# Altium PCB PCB-BOARD.PcbDoc
Units mil, origin at the board's own origin, x right, y up, seen from the top; angles counter-clockwise.
Board outline 1100 x 2700 mil, 4 copper layers (Top Layer 1, Top Layer, Bottom Layer, Bottom Layer 1), stack 22.334 mil thick; 47 components, 55 nets, 230 pads, 90 vias.
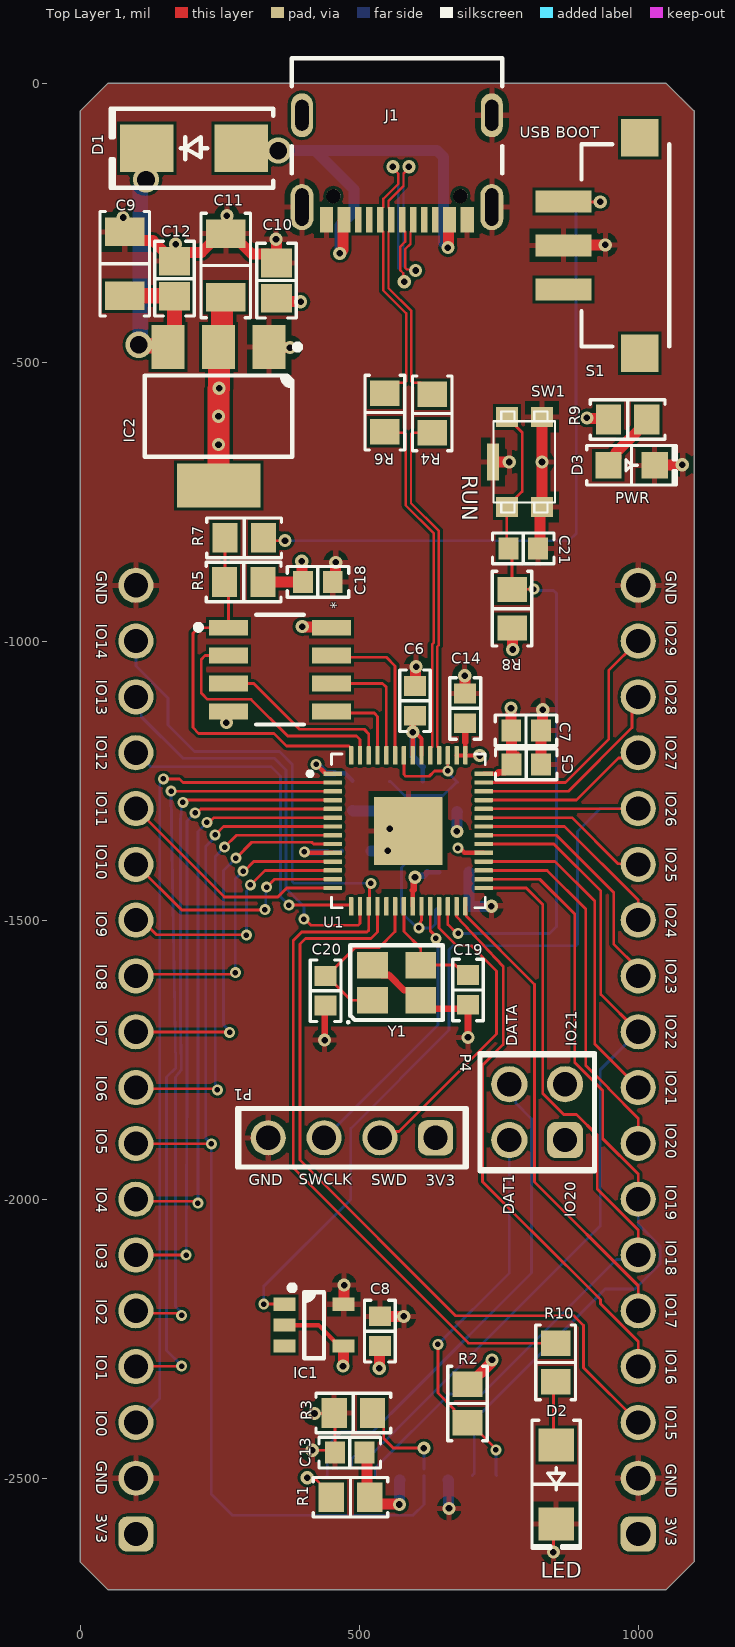
[diagram p0: Top Layer 1 view]
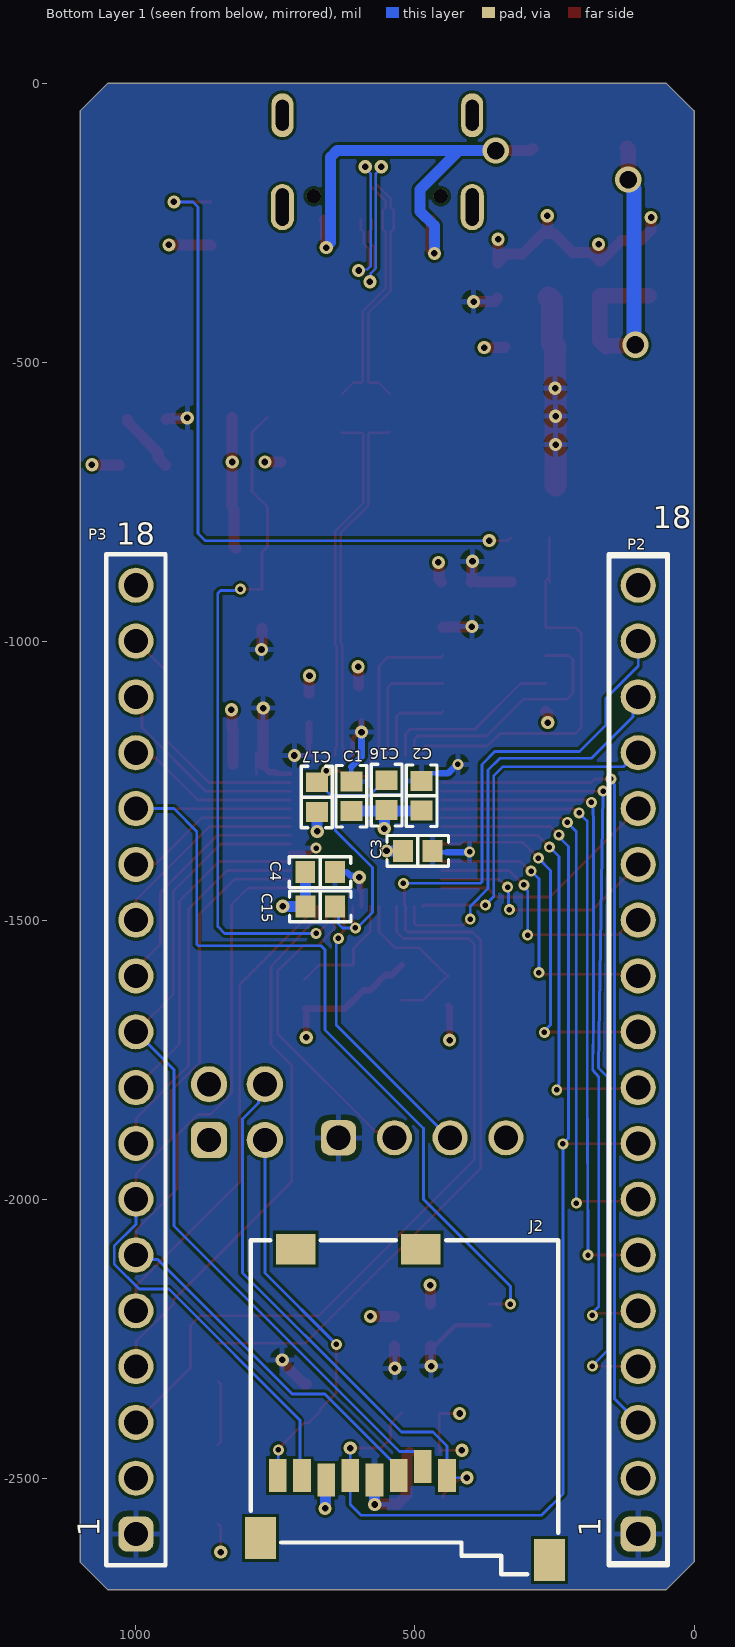
[diagram p1: Bottom Layer 1 view, seen from below]
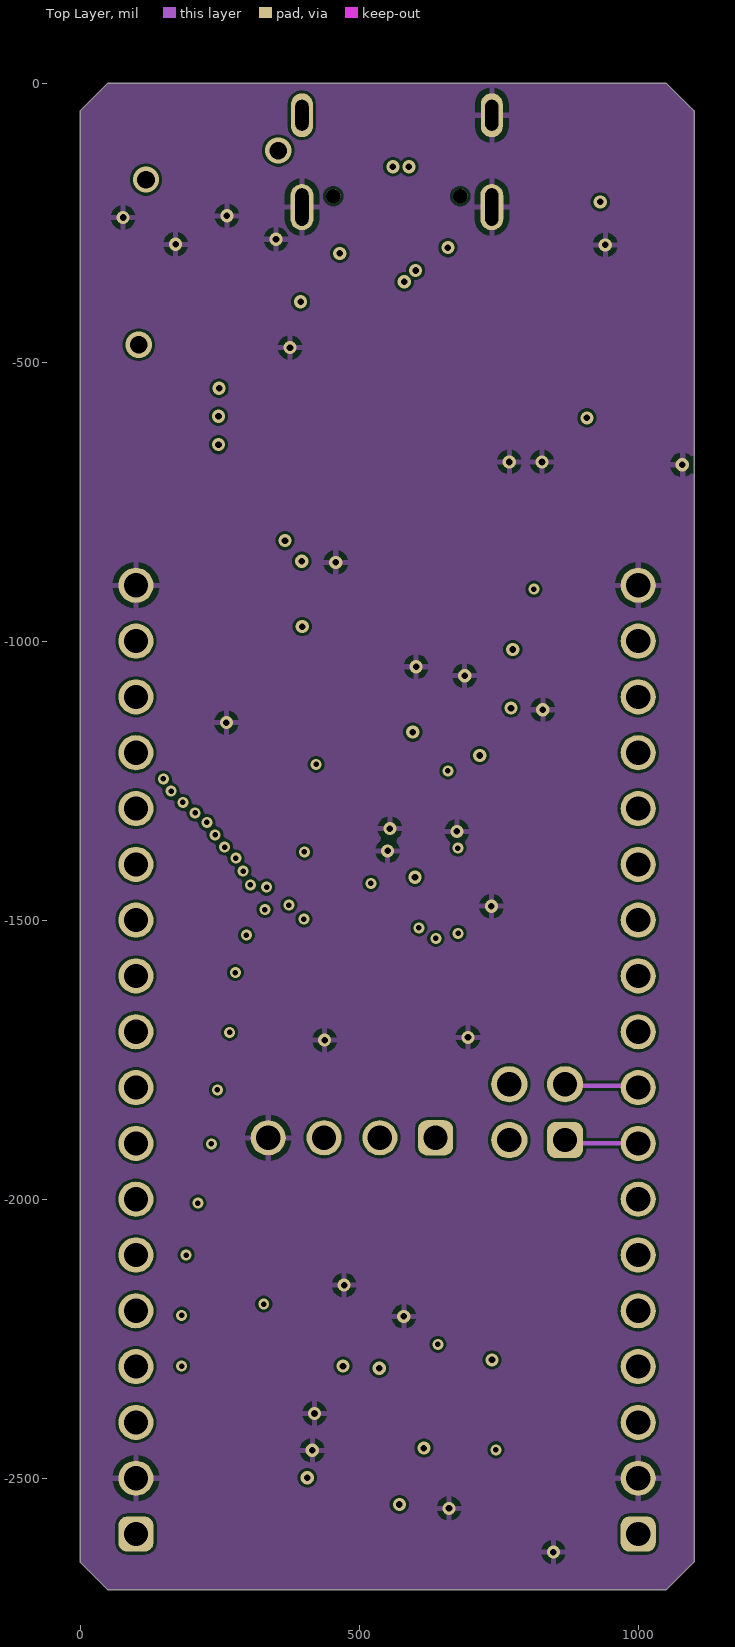
[diagram p2: Top Layer]
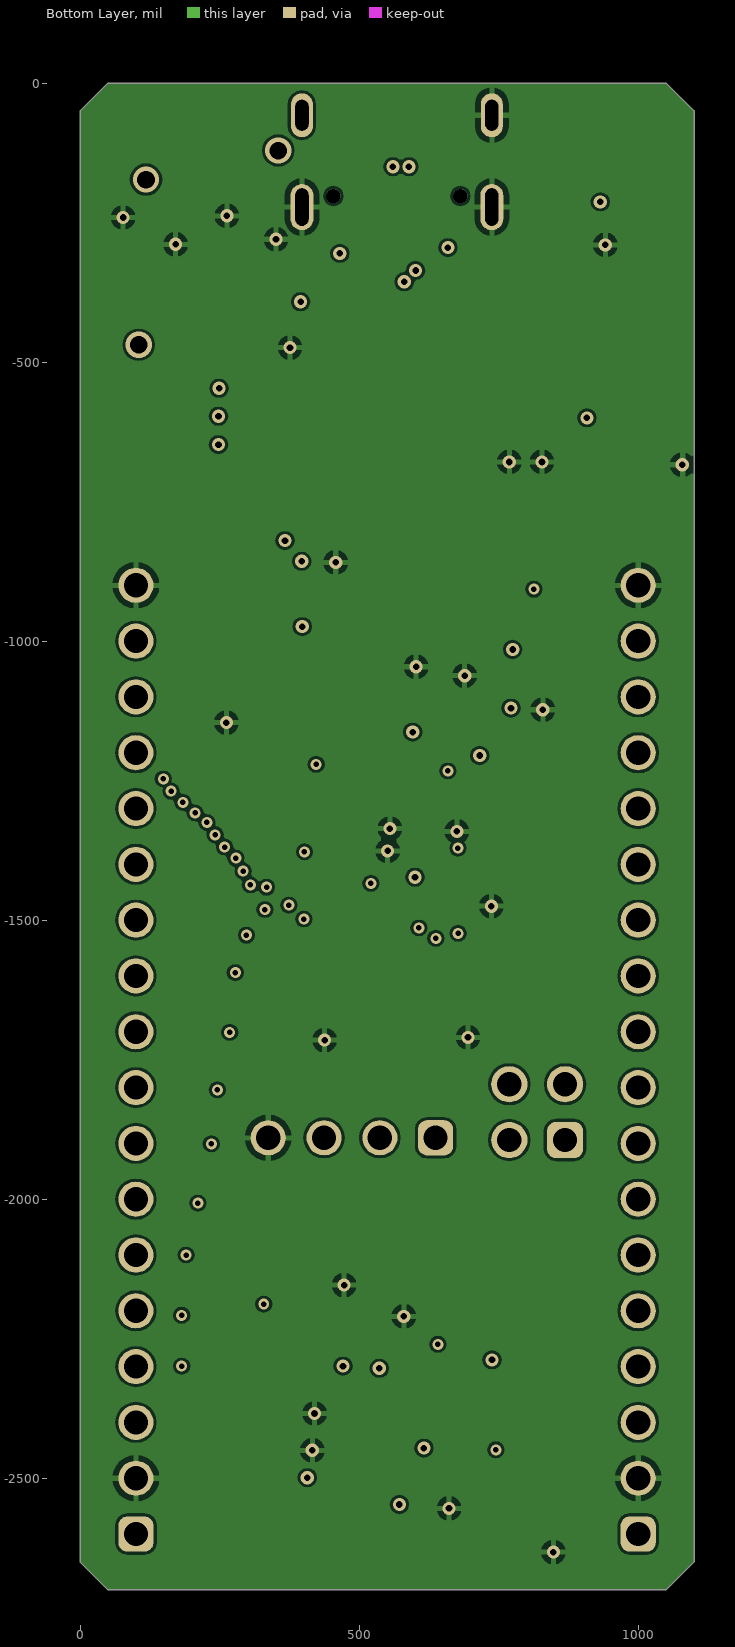
[diagram p3: Bottom Layer]
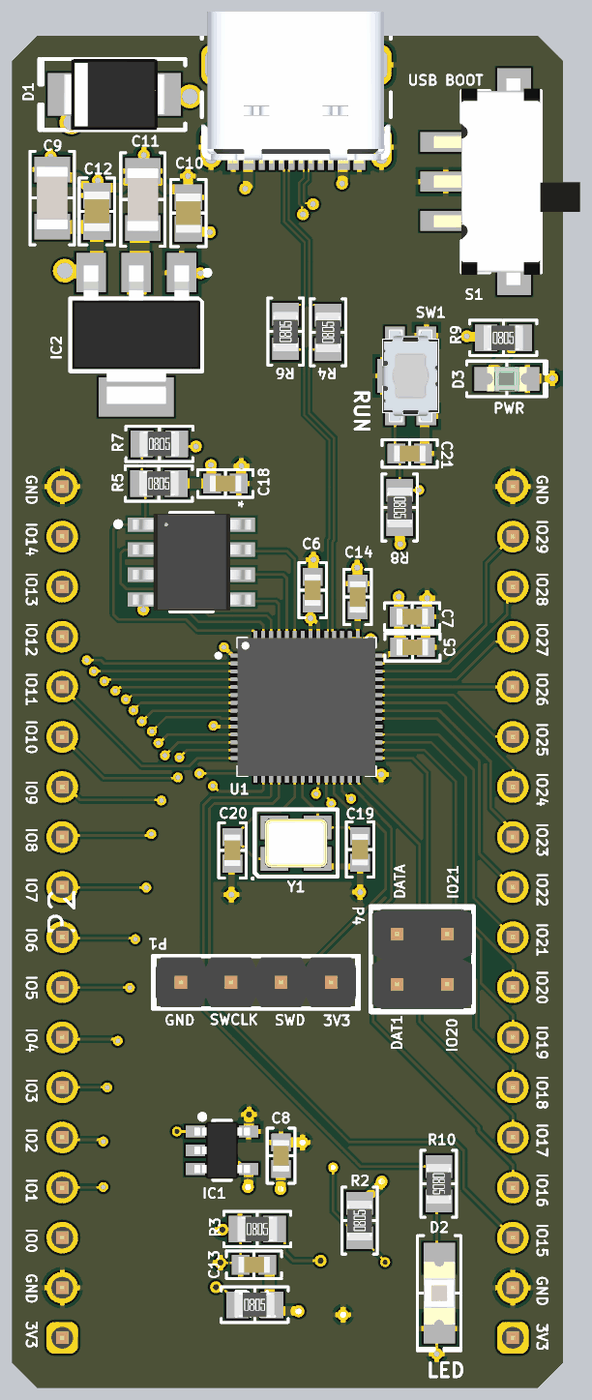
[diagram p4: 3D render of the assembled board from above, using the file's embedded part models]
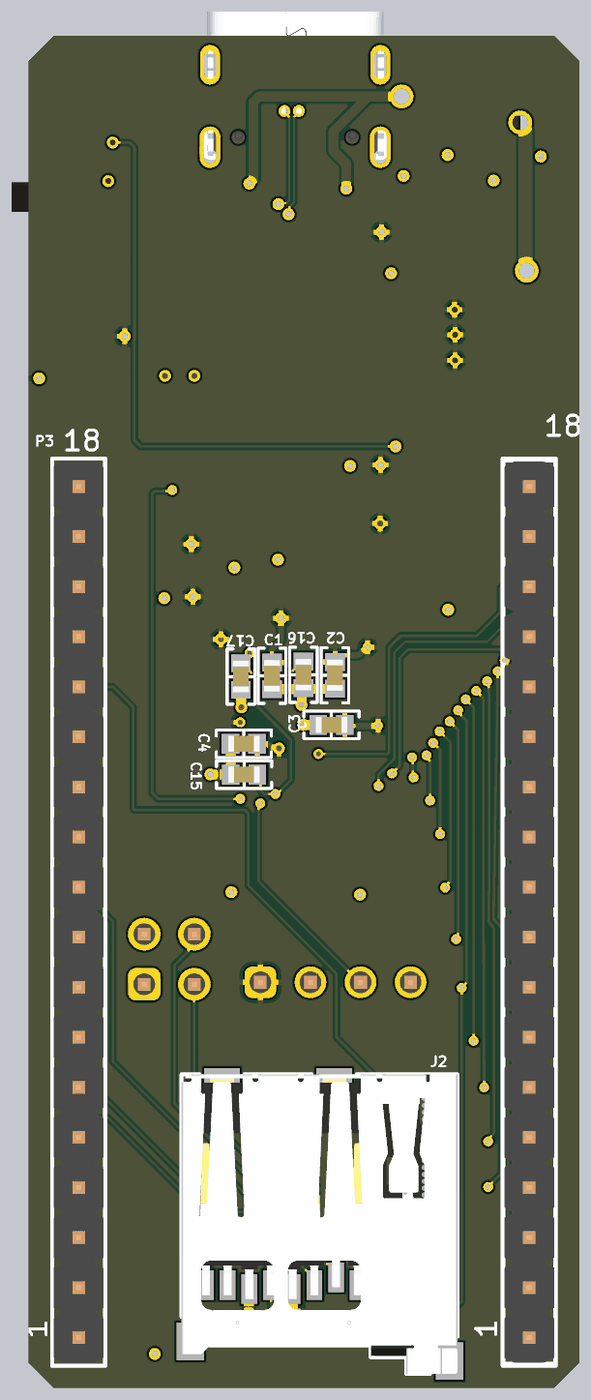
[diagram p5: 3D render of the assembled board from below, using the file's embedded part models]

## Layer stack, top to bottom
Top Solder: solder mask 0.4, Solder Resist, Dk 3.5
Top Layer 1: signal copper 1.378
Dielectric 2: prepreg 2.8, PP-006, Dk 4.1
Top Layer: signal copper 0.689
Dielectric 1: dielectric 12.6, FR-4, Dk 4.8
Bottom Layer: signal copper 0.689
Dielectric 3: prepreg 2.8, PP-006, Dk 4.1
Bottom Layer 1: signal copper 1.378
Bottom Solder: solder mask 0.4, Solder Resist, Dk 3.5

## Board outline
0,-2650 50,-2700 1050,-2700 1100,-2650 1100,-50 1050,0 50,0 0,-50

## Design rules (kind name [scope] priority, off if disabled: settings)
Clearance [All] p1: gap=5 ignorepadtopadclearanceinfootprint=FALSE
DiffPairsRouting [All] p1: maxlimit=5 minlimit=5 mostfreqgap=5 toplayer_minwidth=4.37 toplayer_maxwidth=4.37 toplayer_prefwidth=4.37 midlayer1_minwidth=3.09 midlayer1_maxwidth=3.09 midlayer1_prefwidth=3.09 midlayer2_minwidth=3.09 midlayer2_maxwidth=3.09 midlayer2_prefwidth=3.09 bottomlayer_minwidth=4.37 bottomlayer_maxwidth=4.37 bottomlayer_prefwidth=4.37 impedanceprofiledriven=TRUE impedanceprofileid={40BCD67F-10B7-4EB6-93B4-D688A7104E7D} impedanceprofilevalue=90.000000 maxuncoupledlength=500
MinimumSolderMaskSliver [All] p1: minsoldermaskwidth=5
PolygonConnect [All] p1: connectstyle=Relief reliefconductorwidth=10 reliefentries=4 polygonreliefangle="90 Angle" airgapwidth=10
RoomDefinition RP2040-MCU [InComponentClass('RP2040-MCU')] p1: confinementstyle=ConfineOut formatcopy=TRUE lockcomponents=FALSE outline 1812,-724 2724,-724 2724,-150 1812,-150
RoutingVias [All] p1: holewidth=11.81 width=23.62 viastyle="Through Hole" minholewidth=11.81 minwidth=19.68 maxholewidth=59.06 maxwidth=78.74
SilkToSilkClearance [All] p1: silktosilkclearance=5
SilkToSolderMaskClearance [IsPad] p1: minsilkscreentomaskgap=5 clearancetoexposedcopper=TRUE
SolderMaskExpansion [All] p1: expansion=4 istentingtop=FALSE
Width [All] p1: maxlimit=39.37 minlimit=5 preferedwidth=10
26 further rules are at their usual default settings.

## Classes and differential pairs
differential pair USB0: +USB0_P -USB0_N
differential pair USB: +USB_P -USB_N

## Components (designator, comment, footprint, x,y, rotation, side; value= is the part's Value field where it differs from the comment)
* "IC_FLASH_32MB_W25Q32JV" SOIC_8 358,-1051 r270 top
C1 "1 µF" "CAP 0603_1608" 614,-1278 r90 bottom
C2 "0.1 µF" "CAP 0603_1608" 488,-1277 r90 bottom
C3 "0.1 µF" "CAP 0603_1608" 495,-1376 r180 bottom
C4 "0.1 µF" "CAP 0603_1608" 670,-1414 r180 bottom
C5 "0.1 µF" "CAP 0603_1608" 799.43,-1221 r180 top
C6 "0.1 µF" "CAP 0603_1608" 600,-1107 r270 top
C7 "0.1 µF" "CAP 0603_1608" 799,-1160 r180 top
C8 "0.1 µF" "CAP 0603_1608" 537,-2236.43 r270 top
C9 "22 µF" "CAP 1206_3216 - 0.8MM" 80,-323.91 r270 top
C10 "10 µF" "CAP 0805_2012" 352,-354 r270 top
C11 "22 µF" "CAP 1206_3216 - 0.8MM" 261,-326.91 r270 top
C12 "10 µF" "CAP 0805_2012" 169,-350.5 r270 top
C13 "0.1 µF" "CAP 0603_1608" 483,-2454 r0 top
C14 "1 µF" "CAP 0603_1608" 690,-1120.57 r270 top
C15 "0.1 µF" "CAP 0603_1608" 669.69,-1475.24 r180 bottom
C16 "0.1 µF" "CAP 0603_1608" 551,-1276 r90 bottom
C17 "1 µF" "CAP 0603_1608" 676,-1279.57 r90 bottom
C18 "0.1 µF" "CAP 0603_1608" 426,-894 r180 top
C19 "22 pF" "CAP 0603_1608" 695,-1625 r90 top
C20 "22 pF" "CAP 0603_1608" 440,-1626.57 r90 top
C21 "1 µF" "CAP 0603_1608" 794,-834 r180 top
D1 "B220-13-F" "DO214AA SMB" 204,-117 r180 top
D2 "Red" "LED 1206_3216 RED" 853,-2511 r270 top
D3 "Green" "LED 0805_2012 GREEN" 988,-685 r0 top
IC1 "TMP37GRTZ-REEL7" "ANALOG SOT-23-5 RJ-5" 419.15,-2225.6 r0 top
IC2 "LD1117S33TR" "ST SOT-223" 248,-597 r270 top
J1 "USB 2.0 Type C Connector" GCT_USB4105-GF-A 567.53,-57.8 r180 top
J2 "693071010811" "WURTH 693071010811" 519,-2373 r180 bottom
P1 "61300411121" 61300411121 487,-1890 r180 top
P2 "61301811121" 61301811121 100,-1750 r90 bottom locked
P3 "61301811121" 61301811121 1000,-1750 r90 bottom
P4 "61300421121" 61300421121 819,-1844 r90 top
R1 "240 Ohms" "RES 0805_2012" 484.45,-2534 r0 top
R2 "240 Ohms" "RES 0805_2012" 694,-2366 r90 top
R3 "240 Ohms" "RES 0805_2012" 489.55,-2383 r0 top
R4 "240 Ohms" "RES 0805_2012" 631,-592 r90 top
R5 "240 Ohms" "RES 0805_2012" 293,-894 r0 top
R6 "240 Ohms" "RES 0805_2012" 546,-590.55 r90 top
R7 "240 Ohms" "RES 0805_2012" 294,-815 r0 top
R8 "240 Ohms" "RES 0805_2012" 774,-942 r270 top
R9 "240 Ohms" "RES 0805_2012" 981,-603 r0 top
R10 "240 Ohms" "RES 0805_2012" 852,-2292.45 r270 top
S1 "SS312SAH4-R" "NKK SS312SAH4" 977,-291 r180 top
SW1 "435431019840" WS-TASV_L4.1W2.8H1.9_4354x10198x0 796,-679 r90 top
U1 "RP2040" QFN40P700X700X90-57N-RP2040 588,-1340 r0 top locked
Y1 "16 MHz" "NDK NX3225SA" 567,-1612 r0 top

## Footprints (in the part's own frame and the unit in brackets; to place one, negate y for a bottom-side part, rotate by r counter-clockwise, add the part's x,y. Pads: shape width x height; smd on the part's side, far side on the other; paste and mask are expansions set on the pad)
61300411121 [mm] "Pin Header, pitch 2.54 mm, THT, Vertical, single row, 4p"
  rrect50% 1.6x1.6 hole 1.1: 1(-3.81,0)
  round 1.6 hole 1.1: 2(-1.27,0) 3(1.27,0) 4(3.81,0)
  silkscreen extent -5.23,-1.35 5.23,1.35, body extent -5.08,-1.27 5.08,1.27, height 8.57
61300421121 [mm] "Pin Header, pitch 2.54 mm, THT, Vertical, dual row, 4p"
  rrect50% 1.65x1.65 hole 1.1: 1(-1.27,-1.27)
  round 1.65 hole 1.1: 2(-1.27,1.27) 3(1.27,-1.27) 4(1.27,1.27)
  silkscreen extent -2.69,-2.62 2.69,2.62, body extent -2.54,-2.54 2.54,2.54, height 8.59
61301811121 [mm] "Pin Header, pitch 2.54 mm, THT, Vertical, single row, 18p"
  rrect50% 1.6x1.6 hole 1.1: 1(-21.59,0)
  round 1.6 hole 1.1: 2(-19.05,0) 3(-16.51,0) 4(-13.97,0) 5(-11.43,0) 6(-8.89,0) 7(-6.35,0) 8(-3.81,0) 9(-1.27,0) 10(1.27,0) 11(3.81,0) 12(6.35,0) 13(8.89,0) 14(11.43,0) 15(13.97,0) 16(16.51,0) 17(19.05,0) 18(21.59,0)
  silkscreen extent -23.01,-1.35 23.01,1.35, body extent -22.86,-1.27 22.86,1.27, height 8.57
"ANALOG SOT-23-5 RJ-5" [mm] "SOT23, 5-Leads, Body 2.90x2.80mm, Pitch 0.95mm, IPC Medium Density"
  rect 1x0.6 smd: 1(-1.35,0.95) 2(-1.35,0) 3(-1.35,-0.95) 4(1.35,-0.95) 5(1.35,0.95)
  silkscreen extent -1.12,-1.5 0.45,1.82, body extent -1.41,-1.45 1.41,1.45, height 1.5
"CAP 0603_1608" [mm] "Chip Capacitor, 2-Leads, Body 1.60x0.80mm, IPC Medium Density"
  rect 0.9x1 smd: 1(-0.675,0) 2(0.675,0)
  silkscreen extent -1.4,-0.7 1.4,0.7, body extent -0.8,-0.41 0.8,0.41, height 0.82
"CAP 0805_2012" [mm] "Chip Capacitor, 2-Leads, Body 2.00x1.20mm, IPC Medium Density"
  rect 1.3x1.4 smd: 1(-0.8,0) 2(0.8,0)
  silkscreen extent -1.7,-0.9 1.7,0.9, body extent -1,-0.64 1,0.64, height 1.26
"CAP 1206_3216 - 0.8MM" [mm] "Chip Capacitor, 2-Leads, Body 3.25x1.60mm, IPC Medium Density"
  rect 1.3x1.8 smd: 1(-1.45,0) 2(1.45,0)
  silkscreen extent -2.37,-1.12 2.37,1.12, body extent -1.6,-0.8 1.6,0.8, height 0.8
"DO214AA SMB" [mm] "Molded Diode, 2-Leads, Body 4.31x3.62mm, IPC Medium Density"
  rect 2.45x2.15 smd: 1(-2.15,0) 2(2.15,0)
  silkscreen extent -3.6,-1.8 3.8,1.8, body extent -2.6,-1.8 2.6,1.8, height 2.4
GCT_USB4105-GF-A [mm]
  rect 0.6x1.15 smd: A1_B12(-3.2,4.755) A4_B9(-2.4,4.755) B1_A12(3.2,4.755) B4_A9(2.4,4.755)
  rect 0.3x1.15 smd: A5(-1.25,4.755) A6(-0.25,4.755) A7(0.25,4.755) A8(1.25,4.755) B5(1.75,4.755) B6(0.75,4.755) B7(-0.75,4.755) B8(-1.75,4.755)
  oval 1.05x2.1 hole 0.6 slot 1.7 at 90 deg: S1(-4.32,4.18) S4(4.32,4.18)
  oval 1x2 hole 0.6 slot 1.4 at 90 deg: S2(-4.32,0) S3(4.32,0)
  round 0.65 hole 0.65 unplated: ""(-2.89,3.68) ""(2.89,3.68)
  silkscreen extent -4.79,-2.6 4.79,2.65, body extent -4.76,-2.7 4.82,5.01, height 3.31
"LED 0805_2012 GREEN" [mm] "Chip Diode, 2-Leads, Body 2.00x1.25mm, IPC Medium Density"
  rect 1.2x1.2 smd: 1(-1.05,0) 2(1.05,0)
  silkscreen extent -2.03,-0.9 2.03,0.9, body extent -1,-0.62 1,0.63, height 0.9
"LED 1206_3216 RED" [mm] "Chip Diode, 2-Leads, Body 3.13x1.55mm, IPC Medium Density"
  rect 1.5x1.6 smd: 1(-1.8,0) 2(1.8,0)
  silkscreen extent -2.92,-1.1 2.92,1.1, body extent -1.6,-0.8 1.6,0.8, height 0.9
"NDK NX3225SA" [mm] "Crystal, 4-Leads, Body 2.50x3.20mm, Pitch 2.20mm, IPC Medium Density"
  rect 1.4x1.2 smd: 1(-1.1,-0.8) 2(1.1,-0.8) 3(1.1,0.8) 4(-1.1,0.8)
  silkscreen extent -2.25,-1.85 2.1,1.7, body extent -1.61,-1.26 1.61,1.26, height 0.6
"NKK SS312SAH4" [mm]
  rect 2.55x1 smd: 1(2.825,-2) 2(2.825,0) 3(2.825,2)
  rect 1.7x1.7 smd: M(-0.65,4.9) M(-0.65,-4.9)
  silkscreen extent -2,-4.6 2,4.6, body extent -3.98,-5.25 3.42,5.25, height 2.9
QFN40P700X700X90-57N-RP2040 [mm] "RP2040"
  rrect25% 0.84x0.2 smd: 1(-3.435,2.6) 2(-3.435,2.2) 3(-3.435,1.8) 4(-3.435,1.4) 5(-3.435,1) 6(-3.435,0.6) 7(-3.435,0.2) 8(-3.435,-0.2) 9(-3.435,-0.6) 10(-3.435,-1) 11(-3.435,-1.4) 12(-3.435,-1.8) 13(-3.435,-2.2) 14(-3.435,-2.6) 29(3.435,-2.6) 30(3.435,-2.2) 31(3.435,-1.8) 32(3.435,-1.4) 33(3.435,-1) 34(3.435,-0.6) 35(3.435,-0.2) 36(3.435,0.2) 37(3.435,0.6) 38(3.435,1) 39(3.435,1.4) 40(3.435,1.8) 41(3.435,2.2) 42(3.435,2.6)
  rrect25% 0.2x0.84 smd: 15(-2.6,-3.435) 16(-2.2,-3.435) 17(-1.8,-3.435) 18(-1.4,-3.435) 19(-1,-3.435) 20(-0.6,-3.435) 21(-0.2,-3.435) 22(0.2,-3.435) 23(0.6,-3.435) 24(1,-3.435) 25(1.4,-3.435) 26(1.8,-3.435) 27(2.2,-3.435) 28(2.6,-3.435) 43(2.6,3.435) 44(2.2,3.435) 45(1.8,3.435) 46(1.4,3.435) 47(1,3.435) 48(0.6,3.435) 49(0.2,3.435) 50(-0.2,3.435) 51(-0.6,3.435) 52(-1,3.435) 53(-1.4,3.435) 54(-1.8,3.435) 55(-2.2,3.435) 56(-2.6,3.435)
  rect 3.1x3.1 smd paste-0.57: 57(0,0)
  silkscreen extent -4.57,-3.5 3.5,3.5, body extent -3.5,-3.5 3.5,3.5, height 0.9
"RES 0805_2012" [mm] "Chip Resistor, 2-Leads, Body 2.00x1.25mm, IPC Medium Density"
  rect 1.15x1.35 smd: 1(-0.875,0) 2(0.875,0)
  silkscreen extent -1.7,-0.9 1.7,0.9, body extent -1,-0.62 1,0.63, height 0.6
SOIC_8 [mm]
  rect 0.72x1.78 smd paste+0 mask+0: 1(-1.905,-2.34) 2(-0.635,-2.34) 3(0.635,-2.34) 4(1.905,-2.34) 5(1.905,2.34) 6(0.635,2.34) 7(-0.635,2.34) 8(-1.905,2.34)
  silkscreen extent -2.5,-3.84 2.5,1.07, body extent -2.45,-2.97 2.45,3.02, height 1.76
"ST SOT-223" [mm] "SOT223, 4-Leads, Body 6.50x7.00mm (avg), Pitch 2.30mm, IPC Medium Density"
  rect 2x1.5 smd: 1(-3.15,2.3) 2(-3.15,0) 3(-3.15,-2.3)
  rect 2x3.8 smd: 4(3.15,0)
  silkscreen extent -3.27,-3.35 1.85,3.73, body extent -3.52,-3.25 3.5,3.25, height 1.8
WS-TASV_L4.1W2.8H1.9_4354x10198x0 [mm] "Tact Switch, SMT, body 4.1x2.8mm"
  rect 0.9x1 smd: A1(-2.05,0.8) A2(2.05,0.8) B1(-2.05,-0.8) B2(2.05,-0.8)
  rect 1.7x0.55 smd: G1(0,1.425)
  silkscreen extent -2.3,-1.4 2.3,1.4, body extent -2.3,-1.4 2.3,1.45, height 1.9
"WURTH 693071010811" [mm] "9 (8 + 1) Position Card Connector Secure Digital - microSD™ Surface Mount, Right Angle Gold"
  rect 0.8x1.5 smd: 1(1.94,-3.1) 2(0.84,-2.7) 3(-0.26,-3.1) 4(-1.36,-3.3) 5(-2.46,-3.1) 6(-3.56,-3.3) 7(-4.66,-3.1) 8(-5.76,-3.1)
  rect 1.4x1.9 smd: S(-6.55,-5.95) S(6.6,-6.95)
  rect 1.8x1.4 smd: S(-4.95,7.2) S(0.75,7.2)
  silkscreen extent -7,-7.6 7,7.6, body extent -7,-7.6 7,7.6, height 1.84

## Part data
C1 C14 C17 C21: library part CC0603KRX7R6BB105, "CAP CER 1UF 10V X7R 0603", Device Package="0603 (1608 Metric)", manufacturer=Yageo, Operating Temperature="-55°C ~ 125°C", Supplier Part Number 1=311-1796-1-ND, Temperature Coefficient=X7R, Tolerance=±10%, Voltage - Rated=10V, Applications="General Purpose", Capacitance="1 µF", componentlink1description=Datasheet, componentlink1url=https://www.yageo.com/upload/media/product/productsearch/datasheet/mlcc/UPY-GPHC_X7R_6.3V-to-50V_18.pdf, componentlink2description="DigiKey Link", componentlink2url=https://www.digikey.com/en/products/detail/yageo/CC0603KRX7R6BB105/5195204, lastupdated="6/18/2022 5:53:25 AM", Lifecycle Status=Active, Minimum Order=1, Mounting Type="Surface Mount, MLCC", Package / Case="0603 (1608 Metric)", packaging=TapeAndReel, Part Number=CC0603KRX7R6BB105, Part Status=Active, partid=2290, price=0.02, series=CC, Size / Dimension="0.063\" L x 0.031\" W (1.60mm x 0.80mm)", Supplier 1=DigiKey, Thickness (Max)="0.035\" (0.90mm)"
C2 C3 C4 C5 C6 C7 C8 C13 C15 C16 C18: library part C0603C104K5RAC7411, "CAP CER 0.1UF 50V X7R 0603", Device Package="0603 (1608 Metric)", manufacturer=KEMET, Operating Temperature="-55°C ~ 125°C", Supplier Part Number 1=399-7374-2-ND, Temperature Coefficient=X7R, Tolerance=±10%, Voltage - Rated=50V, Applications="Bypass, Decoupling", Capacitance="0.1 µF", componentlink1description=Datasheet, componentlink1url=https://api.kemet.com/component-edge/download/datasheet/C0603C104K5RAC7411.pdf, componentlink2description="DigiKey Link", componentlink2url=https://www.digikey.com/en/products/detail/kemet/C0603C104K5RAC7411/3317013, lastupdated="6/18/2022 5:53:25 AM", Lifecycle Status=Active, Minimum Order=15000, Mounting Type="Surface Mount, MLCC", Package / Case="0603 (1608 Metric)", packaging=TapeAndReel, Part Number=C0603C104K5RAC7411, Part Status=Active, partid=2233, price=0.01, series="SMD Comm X7R", Size / Dimension="0.063\" L x 0.031\" W (1.60mm x 0.80mm)", Supplier 1=DigiKey, Thickness (Max)="0.035\" (0.90mm)"
C9 C11: library part CL31A226KOCLFNC, "CAP CER 22UF 16V X5R 1206", Device Package="1206 (3216 Metric)", manufacturer="Samsung Electro-Mechanics", Operating Temperature="-55°C ~ 85°C", Supplier Part Number 1=1276-2725-1-ND, Temperature Coefficient=X5R, Tolerance=±10%, Voltage - Rated=16V, Applications="General Purpose", Capacitance="22 µF", componentlink1description=Datasheet, componentlink1url=http://www.samsungsem.com/kr/support/product-search/mlcc/CL31A226KOCLFNC.jsp, componentlink2description="DigiKey Link", componentlink2url=https://www.digikey.com/en/products/detail/samsung-electro-mechanics/CL31A226KOCLFNC/3888383, lastupdated="6/18/2022 5:59:04 AM", Lifecycle Status=Active, Minimum Order=1, Mounting Type="Surface Mount, MLCC", Package / Case="1206 (3216 Metric)", packaging=TapeAndReel, Part Number=CL31A226KOCLFNC, Part Status=Active, partid=18940, price=0.10, series=CL, Size / Dimension="0.126\" L x 0.063\" W (3.20mm x 1.60mm)", Supplier 1=DigiKey, Thickness (Max)="0.037\" (0.95mm)"
C10 C12: library part CGA4J1X7R0J106K125AC, "CAP CER 10UF 6.3V X7R 0805", Device Package="0805 (2012 Metric)", manufacturer="TDK Corporation", Operating Temperature="-55°C ~ 125°C", Ratings=AEC-Q200, Supplier Part Number 1=445-6971-1-ND, Temperature Coefficient=X7R, Tolerance=±10%, Voltage - Rated=6.3V, Applications=Automotive, Capacitance="10 µF", componentlink1description=Datasheet, componentlink1url=https://product.tdk.com/info/en/catalog/datasheets/mlcc_automotive_general_en.pdf?ref_disty=digikey, componentlink2description="DigiKey Link", componentlink2url=https://www.digikey.com/en/products/detail/tdk-corporation/CGA4J1X7R0J106K125AC/2672864, lastupdated="6/18/2022 5:56:43 AM", Lifecycle Status=Active, Minimum Order=1, Mounting Type="Surface Mount, MLCC", Package / Case="0805 (2012 Metric)", packaging=TapeAndReel, Part Number=CGA4J1X7R0J106K125AC, Part Status=Active, partid=3016, price=0.08, series=CGA, Size / Dimension="0.079\" L x 0.049\" W (2.00mm x 1.25mm)", Supplier 1=DigiKey, Thickness (Max)="0.057\" (1.45mm)"
C19 C20: library part 251R14S220GV4T, "CAP CER 22PF 250V C0G/NP0 0603", Device Package="0603 (1608 Metric)", manufacturer="Johanson Technology Inc.", Operating Temperature="-55°C ~ 125°C", Supplier Part Number 1=712-1331-1-ND, Temperature Coefficient="C0G, NP0", Tolerance=±2%, Voltage - Rated=250V, Applications="RF, Microwave, High Frequency", Capacitance="22 pF", componentlink1description=Datasheet, componentlink1url=https://www.johansontechnology.com/downloads/catalog/johanson-technology-multi-layer-high-q-capacitors.pdf, componentlink2description="DigiKey Link", componentlink2url=https://www.digikey.com/en/products/detail/johanson-technology-inc/251R14S220GV4T/1561614, Features="High Q, Low Loss, Ultra Low ESR", lastupdated="6/18/2022 5:53:24 AM", Lifecycle Status=Active, Minimum Order=1, Mounting Type="Surface Mount, MLCC", Package / Case="0603 (1608 Metric)", packaging=TapeAndReel, Part Number=251R14S220GV4T, Part Status=Active, partid=2703, price=0.09, series=S, Size / Dimension="0.062\" L x 0.032\" W (1.57mm x 0.81mm)", Supplier 1=DigiKey, Thickness (Max)="0.035\" (0.89mm)"
D1: "DIODE SCHOTTKY 20V 2A SMB", Capacitance @ Vr, F="200pF @ 4V, 1MHz", Current - Average Rectified (Io)=2A, Current - Reverse Leakage @ Vr="500 µA @ 20 V", manufacturer="Diodes Incorporated", Operating Temperature - Junction="-65°C ~ 150°C", Package / Case="DO-214AA, SMB", Supplier Device Package=SMB, Supplier Part Number 1=B220-FDICT-ND, Voltage - DC Reverse (Vr) (Max)="20 V", Voltage - Forward (Vf) (Max) @ If="500 mV @ 2 A", componentlink1description=Datasheet, componentlink1url=https://www.diodes.com/assets/Datasheets/ds13004.pdf, componentlink2description="DigiKey Link", componentlink2url=https://www.digikey.com/en/products/detail/diodes-incorporated/B220-13-F/804864, Diode Type=Schottky, lastupdated="6/18/2022 6:36:03 AM", Lifecycle Status=Active, Minimum Order=1, Mounting Type="Surface Mount", packaging=TapeAndReel, Part Number=B220-13-F, Part Status=Active, partid=1374, price=0.07, series=-, Speed="Fast Recovery =< 500ns, > 200mA (Io)", Supplier 1=DigiKey
D2: library part APTD3216LSURCK, "LED RED CLEAR 2SMD", Current - Test=2mA, Device Package="1206 (3216 Metric)", Lens Color=Colorless, manufacturer=Kingbright, Millicandela Rating=150mcd, Supplier Device Package=2-SMD, Supplier Part Number 1=754-2050-1-ND, Voltage - Forward (Vf) (Typ)=1.75V, Color=Red, componentlink1description=Datasheet, componentlink1url=http://www.kingbrightusa.com/images/catalog/SPEC/APTD3216LSURCK.pdf, componentlink2description="DigiKey Link", componentlink2url=https://www.digikey.com/en/products/detail/kingbright/APTD3216LSURCK/7043080, Configuration=Standard, Height (Max)=1.90mm, lastupdated="6/18/2022 6:39:53 AM", Lens Size="1.60mm Dia", Lens Style="Round with Domed Top", Lens Transparency=Clear, Lifecycle Status=Active, Minimum Order=1, Mounting Type="Surface Mount", Package / Case="1206 (3216 Metric)", packaging=TapeAndReel, Part Number=APTD3216LSURCK, Part Status=Active, partid=212, price=0.09, series=-, Size / Dimension="3.20mm L x 1.60mm W", Supplier 1=DigiKey, Viewing Angle=40°, Wavelength - Dominant=630nm, Wavelength - Peak=645nm
D3: library part 5975316507F, "LED GREEN 0805 SMD", Current - Test=20mA, Device Package="0805 (2012 Metric)", Lens Color=0.93mm, manufacturer=Dialight, Millicandela Rating=16mcd, Supplier Device Package=0805, Supplier Part Number 1=350-4389-1-ND, Voltage - Forward (Vf) (Typ)=2.2V, Color=Green, componentlink1description=Datasheet, componentlink1url=http://www.dialightsignalsandcomponents.com/Assets/Drawings/2D_Drawings_DrawingDetailedSpec/NewDrawings/18370A.pdf, componentlink2description="DigiKey Link", componentlink2url=https://www.digikey.com/en/products/detail/dialight/5975316507F/9385444, Configuration=Standard, Height (Max)=0.93mm, lastupdated="6/18/2022 6:39:50 AM", Lens Size="1.40mm x 1.24mm", Lens Style="Rectangle with Flat Top", Lifecycle Status=Active, Minimum Order=1, Mounting Type="Surface Mount", Package / Case="0805 (2012 Metric)", packaging=TapeAndReel, Part Number=5975316507F, Part Status=Active, partid=245, price=0.13, series=597, Size / Dimension="2.00mm L x 1.25mm W", Supplier 1=DigiKey, Wavelength - Dominant=560nm
IC1: "SENSOR ANALOG 5C-100C SOT23-5", manufacturer="Analog Devices Inc.", Operating Temperature="-40°C ~ 150°C", Package / Case="SC-74A, SOT-753", Sensing Temperature - Local="5°C ~ 100°C", Supplier Device Package=SOT-23-5, Supplier Part Number 1=505-TMP37GRTZ-REEL7CT-ND, Voltage - Supply="2.7V ~ 5.5V", Accuracy - Highest (Lowest)="±3°C (±4°C)", componentlink1description=Datasheet, componentlink1url=https://www.analog.com/media/en/technical-documentation/data-sheets/TMP35_36_37.pdf, componentlink2description="DigiKey Link", componentlink2url=https://www.digikey.com/en/products/detail/analog-devices-inc/TMP37GRTZ-REEL7/995773, Features="Shutdown Mode", lastupdated="6/18/2022 6:54:11 AM", Lifecycle Status=Active, Minimum Order=1, Mounting Type="Surface Mount", Output Type="Analog Voltage", packaging=TapeAndReel, Part Number=TMP37GRTZ-REEL7, Part Status=Active, price=1.01, Resolution=20mV/°C, Sensor Type="Analog, Local", series=-, Supplier 1=DigiKey, Test Condition="25°C (5°C ~ 100°C)"
IC2: "IC REG LINEAR 3.3V 800MA SOT223", Current - Output=800mA, Current - Quiescent (Iq)=10mA, manufacturer=STMicroelectronics, Package / Case="TO-261-4, TO-261AA", Supplier Device Package=SOT-223, Supplier Part Number 1=497-1242-1-ND, Voltage - Input (Max)=15V, Voltage - Output (Min/Fixed)=3.3V, Voltage Dropout (Max)="1.2V @ 800mA", componentlink1description=Datasheet, componentlink1url=http://www.st.com/content/ccc/resource/technical/document/datasheet/99/3b/7d/91/91/51/4b/be/CD00000544.pdf/files/CD00000544.pdf/jcr:content/translations/en.CD00000544.pdf, componentlink2description="DigiKey Link", componentlink2url=http://digikey.com/product-detail/en/stmicroelectronics/LD1117S33TR/497-1242-1-ND/586242, lastupdated="6/18/2022 6:46:57 AM", Lifecycle Status=Active, Minimum Order=1, Mounting Type="Surface Mount", Number of Regulators=1, Output Configuration=Positive, Output Type=Fixed, packaging=TapeAndReel, Part Number=LD1117S33TR, Part Status=Active, price=0.14, Protection Features="Over Current, Over Temperature", PSRR="75dB (120Hz)", series=-, Supplier 1=DigiKey
J1: library part CON_USB-C_USB4105-GF-A, "USB-C (USB TYPE-C) USB 2.0 Receptacle Connector 24 (16+8 Dummy) Position Surface Mount, Right Angle; Through Hole", Package=None, Availability=Warning, Check_prices=https://www.snapeda.com/parts/USB4105-GF-A/Global%20Connector%20Technology/view-part/4423780/?ref=eda, MF=GCT, MP=USB4105-GF-A, price=None, Purchase-URL=https://pricing.snapeda.com/search/part/USB4105-GF-A/?ref=eda, SnapEDA_Link=https://www.snapeda.com/parts/USB4105-GF-A/Global%20Connector%20Technology/view-part/4423780/?ref=snap
J2: "CONN MICRO SD CARD PUSH-PUSH R/A", manufacturer="Würth Elektronik", Supplier Part Number 1=732-3819-1-ND, Card Type="Secure Digital - microSD™", componentlink1description=Datasheet, componentlink1url=https://katalog.we-online.de/em/datasheet/693071010811.pdf, componentlink2description="DigiKey Link", componentlink2url=http://digikey.com/product-detail/en/w-rth-elektronik/693071010811/732-3819-1-ND/3124603, Connector Type="Connector and Ejector", Contact Finish=Gold, Features=Switch, Height Above Board="0.072\" (1.83mm)", Insertion, Removal Method="Push In, Push Out", lastupdated="5/24/2020 10:56:52 PM", Lifecycle Status=Active, Minimum Order=1, Mounting Feature="Normal, Standard - Top", Mounting Type="Surface Mount, Right Angle", Number of Positions="9 (8 + 1)", packaging=TapeAndReel, Part Number=693071010811, Part Status=Active, price=1.89, series=WR-CRD, Supplier 1=DigiKey
P1: "WR-PHD Pin Header, THT, pitch 2.54mm, Single Row, Vertical, 4p", Contact Resistance=20mOhm, manufacturer="Wurth Elektronik", Operating Temperature="-40 to +105degC", Rated Current=3A, Withstanding Voltage=500VAC, Working Voltage=250VAC, componentlink1description=Manufacturer, componentlink1url=http://www.we-online.de, componentlink2description=Datasheet, componentlink2url=https://www.we-online.com/catalog/datasheet/61300411121.pdf, Gender="Pin Header", Manufacturer Part Number=61300411121, Mounting Technology=THT, Orientation=Vertical, packaging=Bag, Pin Number=4, Pitch=2.54mm, Row Number=Single
P2 P3: "WR-PHD Pin Header, THT, pitch 2.54mm, Single Row, Vertical, 18p", Contact Resistance=20mOhm, manufacturer="Wurth Elektronik", Operating Temperature="-40 to +105degC", Rated Current=3A, Withstanding Voltage=500VAC, Working Voltage=250VAC, componentlink1description=Manufacturer, componentlink1url=http://www.we-online.de, componentlink2description=Datasheet, componentlink2url=https://www.we-online.com/catalog/datasheet/61301811121.pdf, Gender="Pin Header", Manufacturer Part Number=61301811121, Mounting Technology=THT, Orientation=Vertical, packaging=Bag, Pin Number=18, Pitch=2.54mm, Row Number=Single
P4: "WR-PHD Pin Header, THT, pitch 2.54mm, Dual Row, Vertical, 4p", Contact Resistance=20mOhm, manufacturer="Wurth Elektronik", Operating Temperature="-40 to +105degC", Rated Current=3A, Withstanding Voltage=500VAC, Working Voltage=250VAC, componentlink1description=Manufacturer, componentlink1url=http://www.we-online.de, componentlink2description=Datasheet, componentlink2url=https://www.we-online.com/catalog/datasheet/61300421121.pdf, Gender="Pin Header", Manufacturer Part Number=61300421121, Mounting Technology=THT, Orientation=Vertical, packaging=Bag, Pin Number=4, Pitch=2.54mm, Row Number=Dual
R1 R2 R3 R4 R5 R6 R7 R8 R9 R10: library part ERJ-PB6D2400V, "RES SMD 240 OHM 0.5% 1/4W 0805", Device Package="0805 (2012 Metric)", manufacturer="Panasonic Electronic Components", Operating Temperature="-55°C ~ 155°C", Power (Watts)="0.25W, 1/4W", Ratings=AEC-Q200, Supplier Device Package=0805, Supplier Part Number 1=P20946CT-ND, Temperature Coefficient=±50ppm/°C, Tolerance=±0.5%, componentlink1description=Datasheet, componentlink1url=https://industrial.panasonic.com/cdbs/www-data/pdf/RDM0000/AOA0000C328.pdf, componentlink2description="DigiKey Link", componentlink2url=https://www.digikey.com/en/products/detail/panasonic-electronic-components/ERJ-PB6D2400V/6213729, Composition="Thick Film", Features="Automotive AEC-Q200, Pulse Withstanding", Height - Seated (Max)="0.028\" (0.70mm)", lastupdated="6/18/2022 6:27:53 AM", Lifecycle Status=Active, Minimum Order=1, Number of Terminations=2, Package / Case="0805 (2012 Metric)", packaging=TapeAndReel, Part Number=ERJ-PB6D2400V, Part Status=Active, partid=27745, price=0.02, Resistance="240 Ohms", series=ERJ-PB6, Size / Dimension="0.079\" L x 0.049\" W (2.00mm x 1.25mm)", Supplier 1=DigiKey
S1: "SWITCH SLIDE SPDT 0.4VA 28V", Current Rating (Amps)="0.4VA (AC/DC)", manufacturer="NKK Switches", Operating Temperature="-25°C ~ 85°C", Supplier Part Number 1=360-2924-1-ND, Voltage Rating - AC=28V, Actuator Length=2.00mm, Actuator Type=Standard, Circuit=SPDT, componentlink1description=Datasheet, componentlink1url=http://www.nkkswitches.com/pdf/SS3surfaceMount-1.pdf, componentlink2description="DigiKey Link", componentlink2url=http://digikey.com/product-detail/en/nkk-switches/SS312SAH4-R/360-2924-1-ND/1051215, Contact Finish=Gold, Contact Material="Phosphor Bronze", Contact Timing="Shorting (MBB)", lastupdated="1/4/2020 7:10:14 PM", Lifecycle Status=Active, Minimum Order=1, Mounting Type="Surface Mount, Right Angle", packaging=TapeAndReel, Part Number=SS312SAH4-R, Part Status=Active, partid=1, price=1.95, series=SS3, Supplier 1=DigiKey, Switch Function=On-On, Termination Style="Gull Wing", Voltage Rating - DC=28V
SW1: "WS-TASV SMT Washable Tact Switch, 32VDC, 50mA, 400g, height 1.9mm", Actuator Color=Salmon, manufacturer="Wurth Elektronik", Operating Temperature max.=125C, Operating Temperature min.=-55C, Rated Current=50mA, Rated Voltage=32V, componentlink1description="Manufacturer Link", componentlink1url=http://www.we-online.de, componentlink2description=Datasheet, componentlink2url=https://www.we-online.com/catalog/datasheet/435431019840.pdf, Contact Material="Stainless Steel", Contact Plating=Silver, Electrical Life=100000Cycles, Height=1.9mm, Length=4.1mm, Manufacturer Part Number=435431019840, Mounting Technology=SMT, Operation Force=400g, packaging="Tape and Reel", Terminal Material="Copper Alloy", Terminal Plating=Silver, Washable=Yes, Width=2.8mm
U1: "RP2040 chip for Raspberry Pi Pico - ARMÂ® CortexÂ®-M0+ MCU 32-Bit", Package=None, Availability="In Stock", Check_prices=https://www.snapeda.com/parts/RP2040/Raspberry+Pi/view-part/?ref=eda, MF="Raspberry Pi", MP=RP2040, price=None, Purchase-URL=https://pricing.snapeda.com/search/part/RP2040/?ref=eda, SnapEDA_Link=https://www.snapeda.com/parts/RP2040/Raspberry+Pi/view-part/?ref=snap
Y1: library part NX3225SA-16.000000MHZ-B3, "CRYSTAL 16.0000MHZ 7.2PF SMD", ESR (Equivalent Series Resistance)="80 Ohms", Frequency Stability=±15ppm, Frequency Tolerance=±10ppm, Load Capacitance=7.2pF, manufacturer="NDK America, Inc.", Operating Mode=Fundamental, Operating Temperature="-30°C ~ 85°C", Package / Case="4-SMD, No Lead", Supplier Part Number 1=644-1099-1-ND, componentlink1description=Datasheet, componentlink1url="//media.digikey.com/pdf/Data Sheets/NDK PDFs/NX3225SA-16.000000MHz-B3.pdf", componentlink2description="DigiKey Link", componentlink2url=https://www.digikey.com/en/products/detail/ndk-america-inc/NX3225SA-16-000000MHZ-B3/1468340, Frequency="16 MHz", Height - Seated (Max)="0.028\" (0.70mm)", lastupdated="6/18/2022 6:40:35 AM", Lifecycle Status=Active, Minimum Order=1, Mounting Type="Surface Mount", packaging=TapeAndReel, Part Number=NX3225SA-16.000000MHZ-B3, Part Status=Active, partid=593, price=0.44, series=NX3225SA, Size / Dimension="0.126\" L x 0.098\" W (3.20mm x 2.50mm)", Supplier 1=DigiKey, Type="MHz Crystal"

## Via types
v1: diameter 23.62, hole 11.81, Top Layer 1 to Bottom Layer 1, 52 vias
v2: diameter 19.68, hole 9.84, Top Layer 1 to Bottom Layer 1, 35 vias
v3: diameter 47.24, hole 31.5, Top Layer 1 to Bottom Layer 1, 3 vias

## Nets (pads, with @x,y where several pads share a name; then routed paths per layer and width w, separated by ;. In a path a pad name is that pad's centre, name@x,y a point inside that pad or via, vN(x,y) a via of type N, cw(c..) or ccw(c..) an arc to the next point about the centre after c; other vN are vias at no path point)
+3V3: *.8 C1.2 C2.2 C3.2 C4.2 C5.2 C6.2 C7.2 C8.2 C10.2 C11.2 C13.2 C14.2 C18.2 IC1.2 IC1.4 IC2.2 IC2.4 J2.4 P1.1 P2.1 P3.1 R1.2 R2.2 R5.2 R8.2 R9.1 U1.1 U1.10 U1.22 U1.33 U1.42 U1.43 U1.44 U1.48 U1.49 | length 1961.2
  Top Layer 1 w5: C5.2@783.79,-1237.64 C5.2@784.43,-1237 ; C5.2@784.49,-1236.94 784.49,-1200
  Top Layer 1 w7.87: IC1.2 427.02,-2225.6 464.43,-2263 IC1.4 ; v2(402,-1377.78) 403.59,-1379.37 U1.10 ; v2(423,-1221) 423.53,-1221 440.17,-1237.64 U1.1 ; U1.22 595.87,-1446.87 596,-1446.75 ; U1.49 v1(595.87,-1163.13) 600.13,-1163.13 611.62,-1174.62 U1.48 ; U1.44 674.61,-1205 U1.43@690.36,-1205 ; v2(677,-1371) 680.2,-1371 688.57,-1379.37 U1.33 ; 690,-1181 690.36,-1181.36 U1.43 U1.43@690.36,-1205 ; C14.2 C14.2@690.36,-1147.51 ; v1(716,-1205) U1.43@690.36,-1205 ; U1.42 747.36,-1237.64 748,-1237 ; C5.2@765.52,-1230.3 772.85,-1222.97 C5.2
  Top Layer 1 w11.81: v1(595.87,-1163.13) 595.87,-1144.14 C6.2@596.31,-1143.7 ; 596,-1446.75 597.74,-1445.01 597.74,-1425.26 v1(600,-1423) ; 690,-1181 C14.2 ; 748,-1237 750.22,-1234.78 761.04,-1234.78 C5.2@765.52,-1230.3
  Top Layer 1 w19.68: R5.2 C18.2@387.71,-894 ; C10.2 357.75,-391.25 394.25,-391.25 v1(395,-392) ; v1(397,-857) 397.75,-857.75 397.75,-892.33 C18.2 ; v1(398,-974) 398.75,-974.75 448.88,-974.75 *.8 ; v1(471,-2299) 471,-2297.93 472.3,-2296.64 IC1.4 ; C13.2 514.24,-2458.66 514.24,-2529.34 R1.2 531.14,-2546.25 571.25,-2546.25 v1(572,-2547) ; v1(536,-2303) 536.5,-2302.5 536.5,-2263.5 C8.2 ; R2.2 697.94,-2331.55 737.25,-2292.24 737.25,-2288.75 v1(738,-2288) ; v1(772,-1120) 772.21,-1120.21 772.21,-1159.79 C7.2 772.64,-1160.21 772.64,-1220.79 C5.2 ; R8.2 774.5,-976.95 774.5,-1014.5 v1(775,-1015) ; v1(908,-600) 908.75,-600.75 944.3,-600.75 R9.1
  Top Layer 1 w39.37: IC2.4 v1(248,-648) 248,-548 v1(249,-547) 249,-473.98 IC2.2 254.5,-466.48 254.5,-389.91 260.41,-384 C11.2
  Bottom Layer 1 w7.87: 443,-1378 466.43,-1378 C3.2 ; 456,-1237 474.57,-1237 C2.2 ; v1(600,-1423) v1@604.26,-1423 ; C1.2 614,-1225 ; 622,-1414 C4.2
  Bottom Layer 1 w11.81: v2(402,-1377.78) 402.22,-1378 443,-1378 ; v2(423,-1221) 425.13,-1221 441.13,-1237 456,-1237 ; v1(595.87,-1163.13) 595.87,-1206.87 614,-1225 ; v1(600,-1423) 602.26,-1420.74 615.26,-1420.74 622,-1414
  Bottom Layer 1 w19.68: v1(572,-2547) 572.37,-2546.63 572.37,-2503.28 J2.4@572.73,-2502.92
  other v1: 248,-597
GND: *.4 C1.1 C2.1 C3.1 C4.1 C5.1 C6.1 C7.1 C8.1 C9.1 C10.1 C11.1 C12.1 C13.1 C14.1 C15.1 C16.1 C17.1 C18.1 C19.1 C20.1 C21.1 D2.2 D3.2 IC1.5 IC2.1 J1.A1_B12 J1.B1_A12 J1.S1 J1.S2 J1.S4 J2.6 P1.4 P2.2 P2.18 P3.2 P3.18 R3.1 S1.2 SW1.B1 SW1.B2 SW1.G1 U1.57 Y1.2 Y1.4 | length 2107.1
  Top Layer 1 w5: v1(416,-2450) 452.43,-2450 C13.1 456.43,-2384.32 R3.1 454.1,-2384 v1(420,-2384) ; v1(848.03,-2632.28) 848.03,-2586.83 D2.2
  Top Layer 1 w11.81: v1(438,-1715) 438,-1655.15 C20.1 ; Y1.4 541.41,-1598.22 553.22,-1598.22 580.78,-1625.78 592.59,-1625.78 625.39,-1658.57 C19.1@697,-1658.57
  Top Layer 1 w12: v1(695,-1710) 695,-1660.57 C19.1@697,-1658.57
  Top Layer 1 w19.68: v1(77,-241) 77,-263.83 95.75,-282.57 130.6,-282.57 167.03,-319.01 C12.1 ; v1(171,-289) 170.25,-289.75 170.25,-317.76 C12.1 ; v1(262,-1146) 262,-1129.87 *.4 ; v1(263,-238) 263,-267.83 C11.1 ; IC2.1 339.57,-474 v1(376,-474) ; v1(351,-280) 351.5,-280.5 C10.1@351.5,-322 ; C10.1 C10.1@351.5,-322 ; C18.1 457.25,-889.33 457.25,-859.75 v1(458,-859) ; IC1.5 472.65,-2187.85 472.65,-2154.35 v1(473,-2154) ; C8.1 537.07,-2209.93 579.93,-2209.93 v1(580,-2210) ; C6.1 601.25,-1079.18 601.25,-1046.75 v1(602,-1046) ; v1(689,-1062) 689.5,-1062.5 689.5,-1093.5 C14.1 ; SW1.G1 v1(769,-679) ; C21.1 824.04,-830.54 824.04,-763.17 SW1.B1 SW1.B2 ; C5.1 825.79,-1220.79 825.79,-1160.21 C7.1 828.25,-1157.33 828.25,-1123.75 v1(829,-1123) ; S1.2 866.3,-290.5 940.5,-290.5 v1(941,-290) ; D3.2 1029.84,-684.5 1078.5,-684.5 v1(1079,-684) ; C12.1 184.75,-303.26 217.72,-303.26 251.16,-269.83 C11.1 ; C11.1 270.84,-269.83 307.77,-306.76 336.25,-306.76 C10.1@351.5,-322
  Bottom Layer 1 w19.68: C2.1 488.5,-1304.07 553.5,-1304.07 554,-1304.57 C1.1 C1.1@614.79,-1305.36 ; C3.1 v1(551,-1376) ; v1(555,-1336) 554.5,-1335.5 554.5,-1311.07 C16.1@561,-1304.57 ; J2.6@659.34,-2502.92 660.25,-2503.82 660.25,-2553.25 v1(661,-2554) ; v1(675,-1341) 675.5,-1340.5 675.5,-1306.65 C17.1 C17.1@675.21,-1305.36 ; C15.1 C15.1@696.39,-1475.12 ; C4.1 696.42,-1414.15 696.42,-1475.08 C15.1@696.39,-1475.12 ; v1(737,-1475) 736.88,-1475.12 C15.1@696.39,-1475.12
  other v1: 827.5,-679
IO0: P2.3 U1.2 | length 1479.7
  Top Layer 1 w5: v2(149,-1247) 178,-1247 184.39,-1253.39 U1.2
  Bottom Layer 1 w5: P2.3 142.54,-2357.46 142.54,-1257.27 149,-1250.81 v2(149,-1247)
IO1: P2.4 U1.3 | length 1420.3
  Top Layer 1 w5: P2.4 100.5,-2299.5 181.5,-2299.5 v2(182,-2299) ; v2(163,-1269) 163.13,-1269.13 U1.3
  Bottom Layer 1 w5: v2(163,-1269) 163,-1272.97 171.35,-1762.47 171.35,-1764.59 155,-1780.94 155,-2270.83 182,-2297.83 v2(182,-2299)
IO2: P2.5 U1.4 | length 1284.6
  Top Layer 1 w5: P2.5 104.44,-2204.44 178.44,-2204.44 v2(182,-2208) ; v2(184,-1289) 187.97,-1289 192.09,-1284.88 U1.4
  Bottom Layer 1 w5: 181.31,-1760.34 180,-1683.31 180,-1319.86 181.19,-1304.85 181.19,-1291.81 v2(184,-1289) ; 181.35,-1760.37 181.35,-1768.73 170.69,-1781.46 170.69,-2192 182,-2203.31 v2(182,-2208)
IO3: P2.6 U1.5 | length 1137.8
  Top Layer 1 w5: P2.6 v2(190,-2100) ; v2(206,-1308) 208.9,-1308 216.27,-1300.63 U1.5
  Bottom Layer 1 w5: v2(190,-2100) 191.35,-1772.87 191.35,-1756.23 191.46,-1322.54 v2(206,-1308)
IO4: P2.7 U1.6 | length 1037.8
  Top Layer 1 w5: P2.7 103.5,-2003.5 207.5,-2003.5 v2(211,-2007) ; v2(227,-1325) 230.97,-1325 239.6,-1316.38 U1.6
  Bottom Layer 1 w5: P2.7 P2.7@104.17,-1995.83 ; v2(211,-2007) 211,-1341 v2(227,-1325)
IO5: J2.5 P2.8 R3.2 U1.7 | length 2171.9
  Top Layer 1 w5: P2.8 100.5,-1900.5 234.5,-1900.5 v2(235,-1901) ; v2(242,-1347) 256.87,-1332.13 U1.7 ; R3.2 544.14,-2403.14 544.14,-2429.14 561,-2446 v1(616,-2446)
  Bottom Layer 1 w5: v2(242,-1347) 242,-1350.97 225,-1367.97 225,-1890.73 235,-1900.73 v2(235,-1901) 235,-2528 273.31,-2566.31 596.69,-2566.31 616.04,-2546.96 J2.5@616.04,-2495.05 ; J2.5@616,-2483.23 v1(616,-2446)
IO6: P2.9 U1.8 | length 793.9
  Top Layer 1 w5: P2.9 102,-1802 244,-1802 v2(246,-1804) ; v2(259,-1369) 280.13,-1347.87 U1.8
  Bottom Layer 1 w5: v2(246,-1804) 243.19,-1801.19 243.19,-1794.92 242,-1793.73 242,-1386 v2(259,-1369)
IO7: P2.10 U1.9 | length 681
  Top Layer 1 w5: P2.10 100.5,-1700.5 267.5,-1700.5 v2(268,-1701) ; v2(279,-1389) 307.57,-1360.43 415.07,-1360.43 418.25,-1363.62 U1.9
  Bottom Layer 1 w5: v2(268,-1701) 268,-1698.47 257,-1687.47 257,-1411 v2(279,-1389)
IO8: P2.11 U1.11 | length 535.9
  Top Layer 1 w5: P2.11 103.19,-1596.81 275.19,-1596.81 v2(278,-1594) ; v2(292,-1412) 294.26,-1412 311.14,-1395.12 U1.11
  Bottom Layer 1 w5: v2@278,-1593.85 278,-1426 v2(292,-1412)
IO9: P2.12 U1.12 | length 460.7
  Top Layer 1 w5: P2.12 110.27,-1500 136.27,-1526 297,-1526 v2(298,-1527) ; v2(305,-1437) 331.13,-1410.87 U1.12
  Bottom Layer 1 w5: v2(298,-1527) 298,-1447.97 305,-1440.97 v2(305,-1437)
IO10: P2.13 U1.13 | length 431.3
  Top Layer 1 w5: P2.13 182,-1482 330,-1482 v2(331,-1481) ; v2(334,-1441) 348.39,-1426.61 U1.13
  Bottom Layer 1 w5: v2(331,-1481) 332.5,-1479.5 332.5,-1442.5 v2(334,-1441)
IO11: P2.14 U1.14 | length 425
  Top Layer 1 w5: P2.14 258.34,-1458.34 354.13,-1458.34 370.11,-1442.36 U1.14
IO12: P2.15 U1.15 | length 626.6
  Top Layer 1 w5: v2(374,-1473) 484.2,-1473 485.64,-1474.44 U1.15
  Bottom Layer 1 w5: P2.15 101.01,-1200 126.01,-1225 342,-1225 359,-1242 359,-1458 v2(374,-1473)
IO13: P2.16 U1.16 | length 755.7
  Top Layer 1 w5: v2(401,-1498) 402.17,-1498 413.17,-1509 498.46,-1509 501.39,-1506.07 U1.16
  Bottom Layer 1 w5: P2.16 109.57,-1109.57 109.57,-1135.57 184,-1210 348,-1210 369,-1231 369,-1443.47 401,-1475.47 v2(401,-1498)
IO14: P2.17 R10.1 U1.17 | length 2014.6
  Top Layer 1 w5: v2(521,-1434) 518.57,-1436.43 518.57,-1473.8 U1.17 517.13,-1518.07 514.2,-1521 397,-1521 382,-1536 382,-1944 696,-2258 R10.1
  Bottom Layer 1 w5: P2.17 100,-1044.85 157.55,-1102.4 157.55,-1150.55 205,-1198 357.07,-1198 380,-1220.93 380,-1431.07 382.93,-1434 v2(521,-1434)
IO15: P3.3 U1.18 | length 1425.3
  Top Layer 1 w5: U1.18 532.88,-1520.98 520.86,-1533 404,-1533 394,-1543 394,-1930 673,-2209 885,-2209 902,-2226 902,-2302 P3.3@999.51,-2399.51
IO16: P3.4 U1.27 | length 988.5
  Top Layer 1 w5: U1.27 674.61,-1493.64 758,-1582.91 758,-1723 721,-1760 721,-1968.83 809.02,-2056.85 810.48,-2058.31 932.16,-2179.99 932.16,-2187.31 1000,-2255.15 P3.4
IO17: P3.5 U1.28 | length 853
  Top Layer 1 w5: U1.28 691.8,-1476.67 691.8,-1492.8 814.01,-1615.01 814.01,-1969.16 1000,-2155.15 P3.5
IO18: J2.3 P3.6 U1.29 | length 1472.4
  Top Layer 1 w5: U1.29 799.36,-1442.36 829.02,-1472.02 829.02,-1810.56 866.46,-1848 889.06,-1848 926.5,-1885.45 926.5,-1981.65 1000,-2055.15 P3.6
  Bottom Layer 1 w5: J2.3@529.42,-2495.05 529.42,-2481.27 661.69,-2349 720,-2349 961,-2108 992,-2108 P3.6
IO19: J2.7 P3.7 U1.30 | length 1428.5
  Top Layer 1 w5: U1.30 823.61,-1426.61 886.27,-1489.27 886.27,-1754.73 936.5,-1804.96 936.5,-1891.65 1000,-1955.15 P3.7
  Bottom Layer 1 w5: J2.7@702.65,-2495.05 706,-2491.7 706,-2396 941,-2161 994.14,-2161 1039,-2116.15 1039,-2083.85 1000,-2044.85 P3.7
IO20: P3.8 P4.1 U1.31 | length 803.8
  Top Layer 1 w5: U1.31 836.87,-1410.87 906,-1480 906,-1760.32 946.5,-1800.82 946.5,-1801.65 1000,-1855.15 P3.8
  Top Layer w7.87: P4.1 875,-1900 P3.8
IO21: P3.9 P4.3 U1.32 | length 727.9
  Top Layer 1 w5: U1.32 851.12,-1395.12 922,-1466 922,-1722 P3.9
  Top Layer w7.87: P4.3 872,-1797 997,-1797 P3.9
IO22: J2.2 P3.10 U1.34 | length 1533.2
  Top Layer 1 w5: U1.34 848.62,-1363.62 933,-1448 933,-1633 P3.10
  Bottom Layer 1 w5: J2.2@486.11,-2479.3 486.11,-2465.52 499.36,-2452.27 527.73,-2452.27 908.54,-2071.46 931.93,-2048.07 931.93,-1768.07 P3.10
IO23: P3.11 U1.35 | length 443.3
  Top Layer 1 w5: U1.35 853.87,-1347.87 956,-1450 956,-1542.85 1000,-1586.85 P3.11
IO24: P3.12 U1.36 | length 367.4
  Top Layer 1 w5: U1.36 868.13,-1332.13 999.93,-1463.93 999.93,-1499.93 P3.12
IO25: P3.13 U1.37 | length 311.4
  Top Layer 1 w5: U1.37 881.38,-1316.38 963.93,-1398.93 998.93,-1398.93 P3.13
IO26: IC1.1 P3.14 U1.38 | length 1648.8
  Top Layer 1 w5: v2(329,-2188) 365.8,-2188 IC1.1 ; U1.38 723.55,-1300.32 999.68,-1300.32 P3.14
  Bottom Layer 1 w5: v2(329,-2188) 329,-2156 485,-2000 485,-1873 661,-1697 661,-1553 668,-1546 888.07,-1546 891,-1543.07 891,-1341 932,-1300 P3.14
IO27: P3.15 U1.39 | length 311.9
  Top Layer 1 w5: U1.39 889.12,-1284.88 964.43,-1209.57 990.43,-1209.57 P3.15
IO28: P3.16 U1.40 | length 372.6
  Top Layer 1 w5: U1.40 874.87,-1269.13 988.9,-1155.1 988.9,-1111.1 P3.16
IO29: P3.17 U1.41 | length 453.8
  Top Layer 1 w5: U1.41 869.61,-1253.39 947,-1176 947,-1053 P3.17
NetC9_2: C9.2 C12.2 D1.2 IC2.3 | length 597.2
  Top Layer 1 w27.56: C9.2 80.5,-381.5 168.5,-381.5 C12.2 169,-461.43 IC2.3 155.46,-470.99 106.99,-470.99 v3(105,-469) ; v3(118,-173) 118,-118.35 D1.2
  Bottom Layer 1 w27.56: v3(105,-469) 107.59,-466.41 107.59,-188.74 118,-178.33 v3(118,-173)
NetC15_2: C15.2 C16.2 C17.2 U1.23 U1.45 U1.50 | length 706.4
  Top Layer 1 w5: U1.50 580.13,-1239.2 583.06,-1242.13 625.59,-1242.13 635.03,-1232.68 v2(658.87,-1232.68) U1.45 ; v2(607,-1514) 609.81,-1511.19 609.81,-1502.22 611.62,-1500.4 U1.23
  Bottom Layer 1 w5: C16.2@554,-1251.43 555.97,-1251.43 581.19,-1276.64 650.39,-1276.64 ; C15.2 637,-1481.35 637,-1506.76 629.76,-1514 604,-1514 576,-1486 576,-1406 642.91,-1339.09 642.91,-1284.12 650.39,-1276.64 ; v2(658.87,-1232.68) 658.87,-1235.87 C17.2 674.03,-1253 650.39,-1276.64
NetC19_2: C19.2 U1.21 Y1.3 | length 216.8
  Top Layer 1 w5: U1.21 580.13,-1520.26 610.31,-1550.44 Y1.3 672.11,-1580.5 697.03,-1605.43 C19.2@699,-1605.43
NetC20_2: C20.2 U1.20 Y1.1 | length 302.4
  Top Layer 1 w5: C20.2 C20.2@441.97,-1600 ; Y1.1 485.46,-1643.5 C20.2@441.97,-1600 ; U1.20 564.38,-1520.62 535.62,-1549.38 492.59,-1549.38 C20.2@441.97,-1600
NetD2_1: D2.1 R10.2 | length 116.9
  Top Layer 1 w5: R10.2 848.03,-2330.87 848.03,-2435.17 D2.1
NetD3_1: D3.1 R9.2 | length 110.5
  Top Layer 1 w19.68: D3.1 960.44,-671.22 960.44,-661.94 1015.45,-606.94 R9.2
NetR7_2: R7.2 S1.1 | length 1266.5
  Top Layer 1 w5: R7.2 333.45,-820 v1(367,-820) ; S1.1 866.54,-213 v1(932,-213)
  Bottom Layer 1 w5: v1(367,-820) 876,-820 889,-807 889,-608.31 888.69,-608 888.69,-222.31 898,-213 v1(932,-213)
QSPI_SCK: *.6 U1.52 | length 223.4
  Top Layer 1 w5: *.6 542,-1076 548.63,-1082.63 U1.52
QSPI_SD0: *.5 U1.53 | length 156.3
  Top Layer 1 w5: *.5 453.13,-1129 527,-1129 532.88,-1134.88 U1.53
QSPI_SD1: *.2 U1.55 | length 459.1
  Top Layer 1 w5: *.2 224,-1026 217,-1033 217,-1093 228.33,-1104.33 306.33,-1104.33 372,-1170 495,-1170 501.39,-1176.39 U1.55
QSPI_SD2: *.3 U1.54 | length 327.2
  Top Layer 1 w5: *.3 311,-1076 393,-1158 509,-1158 517.13,-1166.13 U1.54
QSPI_SD3: *.7 U1.51 | length 282.3
  Top Layer 1 w5: *.7 453.13,-1029 549,-1029 564.38,-1044.38 U1.51
QSPI_SS: *.1 R5.1 R7.1 U1.56 | length 721.7
  Top Layer 1 w5: R5.1 259.55,-893 R5.1@259.55,-885 ; R7.1 R5.1@259.55,-885 ; U1.56 485.64,-1192.17 481.47,-1188 370,-1188 347.31,-1165.31 212.31,-1165.31 202,-1155 202,-986 212,-976 *.1 265.87,-891.32 R5.1@259.55,-885
RUN: C21.2 R8.1 SW1.A1 SW1.A2 U1.26 | length 1254.6
  Top Layer 1 w5: U1.26 658.87,-1507.87 674.74,-1523.74 v2(677.26,-1523.74) ; SW1.A2 792,-625.79 792,-732.21 SW1.A1 764.5,-831.08 C21.2 774,-840.57 R8.1 774.55,-907 v2(813,-907)
  Bottom Layer 1 w5: v2(677.26,-1523.74) 841.26,-1523.74 853.31,-1511.69 853.31,-914.31 848.26,-909.26 815.26,-909.26 v2(813,-907)
SD_DAT1: J2.8 P4.2 R2.1 | length 702.2
  Top Layer 1 w5: v2(641,-2260) 641,-2347.45 669.93,-2376.37 669.93,-2380.31 690.06,-2400.45 R2.1 697.94,-2400.45 745,-2447.51 v2(745,-2449)
  Bottom Layer 1 w5: v2(641,-2260) 769,-2132 P4.2 ; v2(745,-2449) 745,-2494.08 J2.8@745.96,-2495.05
SD_DAT2: J2.1 P4.4 R1.1 | length 999.3
  Top Layer 1 w5: v1(407,-2499) 410.56,-2502.56 422.5,-2502.56 450,-2530.06 R1.1
  Bottom Layer 1 w5: v1(407,-2499) 438.86,-2499 442.81,-2495.05 442.81,-2442.19 468,-2417 524,-2417 587,-2354 808.98,-2132.02 808.98,-1855.98 780.47,-1827.47 780.47,-1805.47 P4.4
SWCLK: P1.3 U1.24 | length 504.1
  Top Layer 1 w5: U1.24 627.37,-1518.92 637.24,-1528.79 v2(637.24,-1532.76)
  Bottom Layer 1 w5: P1.3@439,-1890 641,-1688 641,-1543.03 640.05,-1542.08 640.05,-1535.57 v2(637.24,-1532.76)
SWD: P1.2 U1.25 | length 570.7
  Top Layer 1 w5: P1.2@539,-1890 550.1,-1878.9 571.1,-1878.9 746,-1704 746,-1591 701,-1546 675,-1546 643.12,-1514.12 U1.25
USB0_N: R4.1 U1.46 | length 638.1
  Top Layer 1 w4.37: R4.1 595.44,-626.45 592.88,-629.01 592.88,-752.88 642.74,-802.74 642.74,-1007.03 639.93,-1009.84 639.93,-1188.97 643.12,-1192.17 U1.46
USB0_P: R6.1 U1.47 | length 638.1
  Top Layer 1 w4.37: R6.1 547.45,-626.45 580.96,-626.45 583.52,-629.01 583.52,-756.76 633.38,-806.62 633.38,-1003.15 630.56,-1005.97 630.56,-1188.97 627.37,-1192.17 U1.47
USB_N: J1.A7 J1.B7 R4.2 | length 787.4
  Top Layer 1 w4.37: v1(589,-150) 589,-152.56 579.37,-162.19 579.37,-184.61 552.53,-211.46 552.53,-223.11 557.69,-228.27 J1.A7 557.69,-261.73 552.53,-266.89 552.53,-367.75 593.48,-408.71 593.48,-534.54 596.04,-537.1 610.55,-537.1 R4.2 ; J1.B7 597.06,-261.73 591.9,-266.89 591.9,-288.18 582.64,-297.44 582.64,-331.26 585.58,-334.19 599.19,-334.19 v1(601,-336)
  Bottom Layer 1 w4.37: v1(589,-150) 589,-152.56 579.37,-162.19 579.37,-327.99 585.58,-334.19 599.19,-334.19 v1(601,-336)
USB_P: J1.A6 J1.B6 R6.2 | length 802.9
  Top Layer 1 w4.37: R6.2 565.01,-537.1 581.56,-537.1 584.12,-534.54 584.12,-412.58 543.16,-371.63 543.16,-266.89 538,-261.73 J1.B6 538,-228.27 543.16,-223.11 543.16,-207.58 570.01,-180.73 570.01,-162.19 560.38,-152.56 v1(560.38,-150) ; J1.A6 577.37,-261.73 582.53,-266.89 582.53,-284.3 573.27,-293.56 573.27,-335.13 578.95,-340.81 578.95,-354.43 v1(580.76,-356.24)
  Bottom Layer 1 w4.37: v1(560.38,-150) 560.38,-152.56 570.01,-162.19 570.01,-331.87 578.95,-340.81 578.95,-354.43 v1(580.76,-356.24)
VBUS: D1.1 J1.A4_B9 J1.B4_A9 | length 863.5
  Top Layer 1 w19.68: D1.1 292.65,-121 v3(355,-121) ; v1@471.07,-299.47 471.07,-246.97 J1.B4_A9 ; v1(659,-295) v1@659.75,-294.25 ; v1@660.05,-292.89 660.05,-246.97 J1.A4_B9
  Bottom Layer 1 w19.68: v3(355,-121) 421,-121 ; v1(465.31,-305.23) 465.31,-255.74 491,-230.04 491,-191 421,-121 ; v1(659,-295) 659,-293.93 651,-285.93 651,-132.53 639.47,-121 421,-121
pads on no net: IC1.3 J1. J1.A5 J1.A8 J1.B5 J1.B8 J1.S3 J2.S S1.3 S1.M U1.19

## Polygon pours and split planes (outlines as drawn)
+3V3 on Bottom Layer 1 "+3V3_L04_P001" (solid, pour order 1): 0,-50 50,0 1050,0 1100,-50 1100,-2650 1050,-2700 50,-2700 0,-2650
GND on Top Layer 1 "GND_L01_P002" (solid, pour order 2): 0,-2650 50,-2700 1050,-2700 1100,-2650 1100,-50 1050,0 50,0 0,-50
GND on Bottom Layer "GND_L03_P003" (solid, pour order 3): 0,-2650 50,-2700 1050,-2700 1100,-2650 1100,-50 1050,0 50,0 0,-50
GND on Top Layer "GND_L02_P000" (solid, pour order 0): 0,-50 50,0 1050,0 1100,-50 1100,-2650 1050,-2700 50,-2700 0,-2650

## Other copper
Top Layer 1:
  pour cut-out: 389,-1537.2 540,-1537.2 540,-1445 595,-1445 595,-1537.2 730,-1537.2 730,-1690 389,-1690

## Silkscreen, mask and mechanical layers (free items; w line width, h text height)
Top Overlay:
  text "USB BOOT" at 787.94,-98.06 h19.68
  text "RUN" at 684.91,-702.91 h27.56 r270
  text "PWR" at 958.94,-753.06 h19.68
  text "GND" at 28.94,-873.94 h19.68 r270
  text "GND" at 1048.94,-873.94 h19.68 r270
  text "IO29" at 1048.94,-963.94 h19.68 r270
  text "IO14" at 28.94,-968.94 h19.68 r270
  text "IO13" at 28.94,-1068.94 h19.68 r270
  text "IO28" at 1048.94,-1068.94 h19.68 r270
  text "IO12" at 28.94,-1168.94 h19.68 r270
  text "IO27" at 1048.94,-1168.94 h19.68 r270
  text "IO11" at 28.94,-1268.94 h19.68 r270
  text "IO26" at 1048.94,-1268.94 h19.68 r270
  text "IO10" at 28.94,-1363.94 h19.68 r270
  text "IO25" at 1048.94,-1368.94 h19.68 r270
  text "IO24" at 1048.94,-1468.94 h19.68 r270
  text "IO9" at 28.94,-1483.94 h19.68 r270
  text "IO23" at 1048.94,-1568.94 h19.68 r270
  text "IO8" at 28.94,-1578.94 h19.68 r270
  text "IO22" at 1048.94,-1668.94 h19.68 r270
  text "IO7" at 28.94,-1678.94 h19.68 r270
  text "IO21" at 1048.94,-1768.94 h19.68 r270
  text "IO6" at 28.94,-1778.94 h19.68 r270
  text "IO20" at 1048.94,-1863.94 h19.68 r270
  text "IO5" at 28.94,-1873.94 h19.68 r270
  text "IO19" at 1048.94,-1973.94 h19.68 r270
  text "SWCLK" at 391.94,-1974.06 h19.68
  text "GND" at 301.94,-1975.06 h19.68
  text "SWD" at 521.94,-1975.06 h19.68
  text "3V3" at 618.94,-1976.06 h19.68
  text "IO4" at 28.94,-1978.94 h19.68 r270
  text "IO18" at 1048.94,-2073.94 h19.68 r270
  text "IO3" at 28.94,-2078.94 h19.68 r270
  text "IO17" at 1048.94,-2168.94 h19.68 r270
  text "IO2" at 28.94,-2178.94 h19.68 r270
  text "IO16" at 1048.94,-2268.94 h19.68 r270
  text "IO1" at 28.94,-2278.94 h19.68 r270
  text "IO15" at 1048.94,-2368.94 h19.68 r270
  text "IO0" at 28.94,-2378.94 h19.68 r270
  text "GND" at 28.94,-2468.94 h19.68 r270
  text "GND" at 1048.94,-2473.94 h19.68 r270
  text "3V3" at 28.94,-2563.94 h19.68 r270
  text "3V3" at 1048.94,-2568.94 h19.68 r270
  text "LED" at 824.91,-2678.09 h27.56
Mechanical 1:
  lines w10: 0,-2650 50,-2700 1050,-2700 1103,-2647 1103,-55 1048,0 50,0 0,-50 0,-2650

## Text inside footprints (layer, text, board x,y; h text height)
P2: Bottom Overlay "18" at 74,-798 h40; Bottom Overlay "1" at 166.93,-2604.72 h40 r270
P3: Bottom Overlay "1" at 1065,-2605 h40 r270; Bottom Overlay "18" at 1035.22,-827.35 h40
P4: Top Overlay "DATA" at 783.57,-1725.89 h19.68 r90; Top Overlay "IO21" at 889.87,-1725.89 h19.68 r90; Top Overlay "DAT1" at 778,-2028 h19.68 r90; Top Overlay "IO20" at 888,-2032 h19.68 r90